# Altium PCB TB88_only.PcbDoc
Units mil, origin at the board's own origin, x right, y up, seen from the top; angles counter-clockwise.
Board outline 1620 x 1380 mil, 2 copper layers (Top Layer, Bottom Layer); 6 components, 4 nets, 14 pads, 0 vias.
Unrouted connection lines stored in the file: 1.
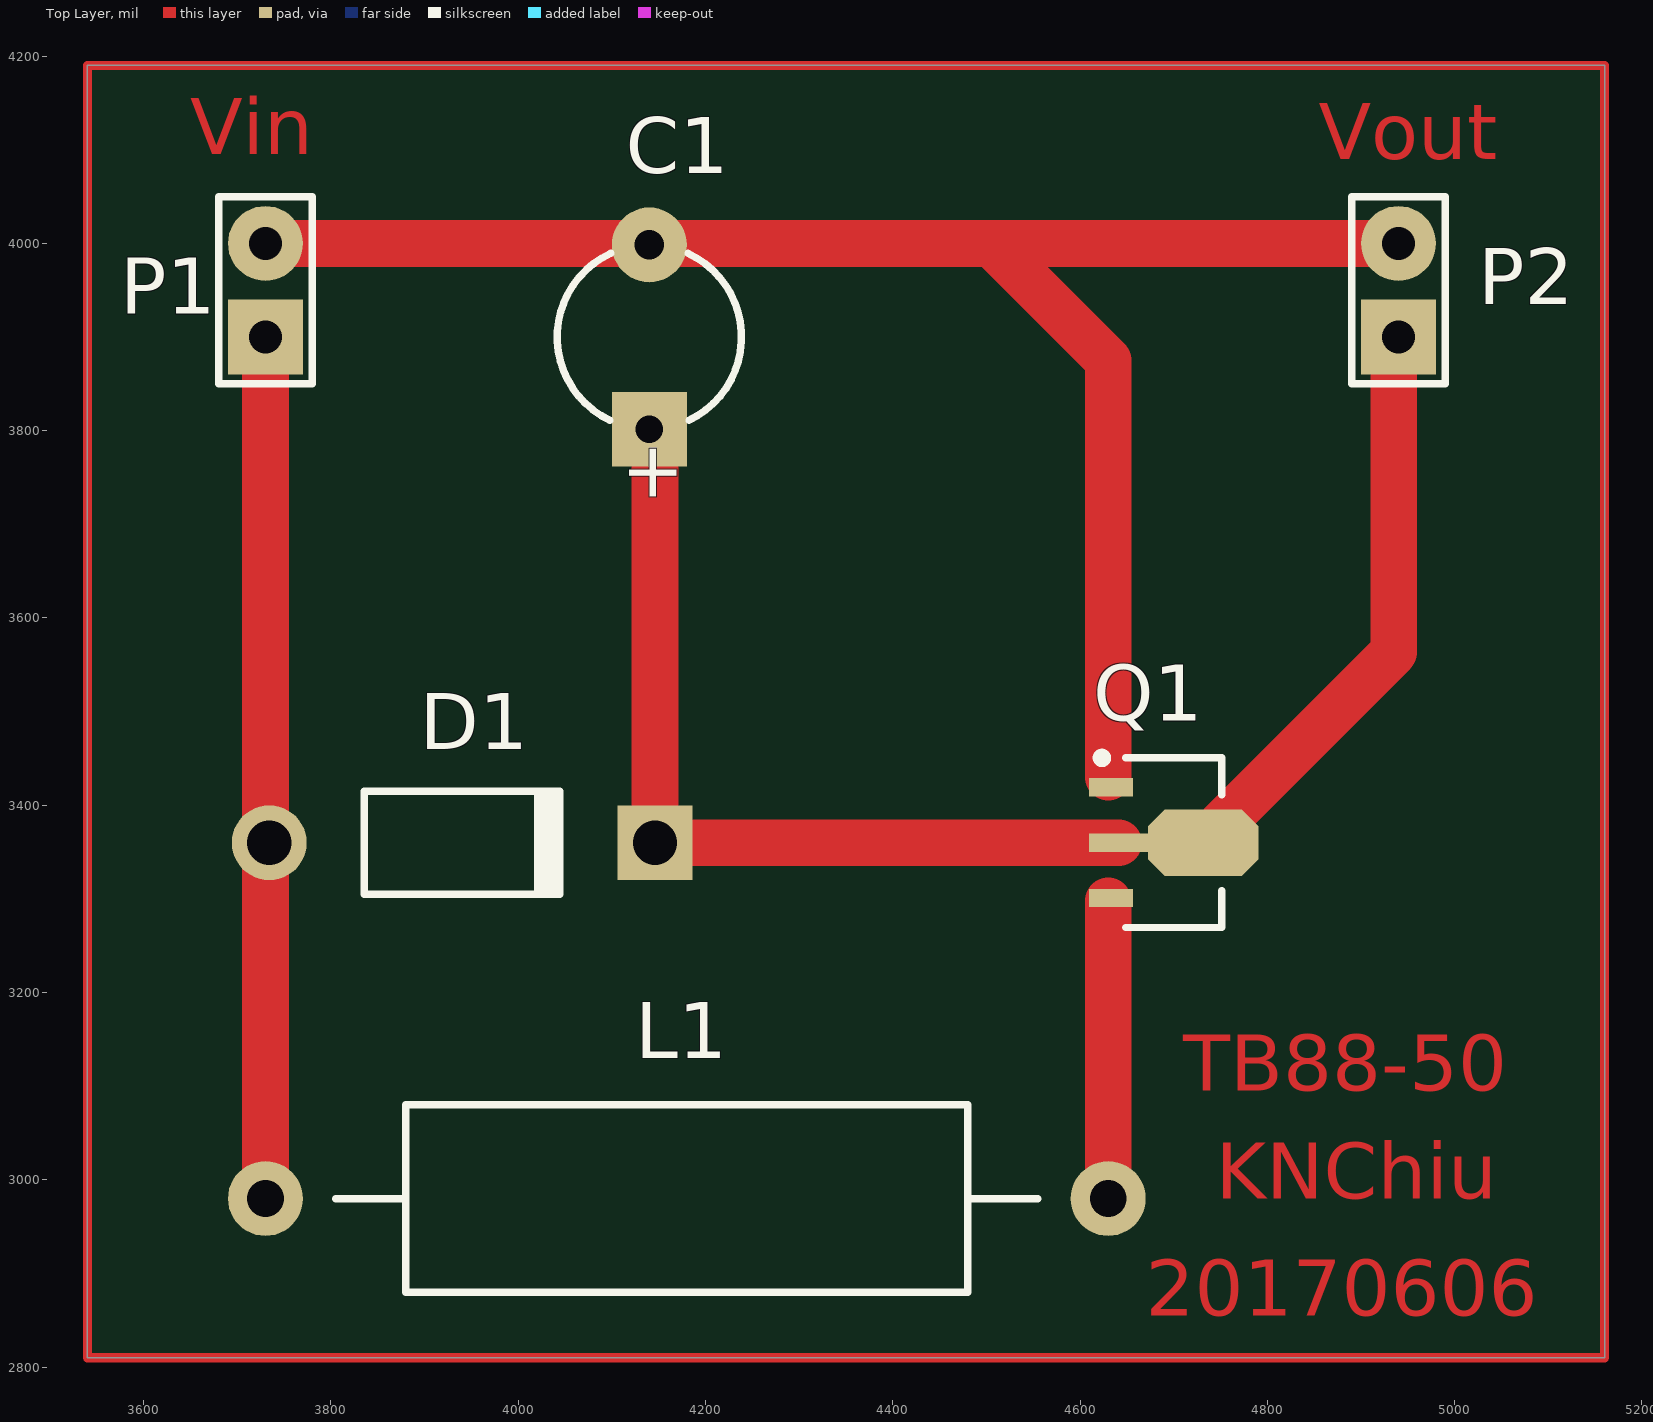
[diagram p0: Top Layer view]
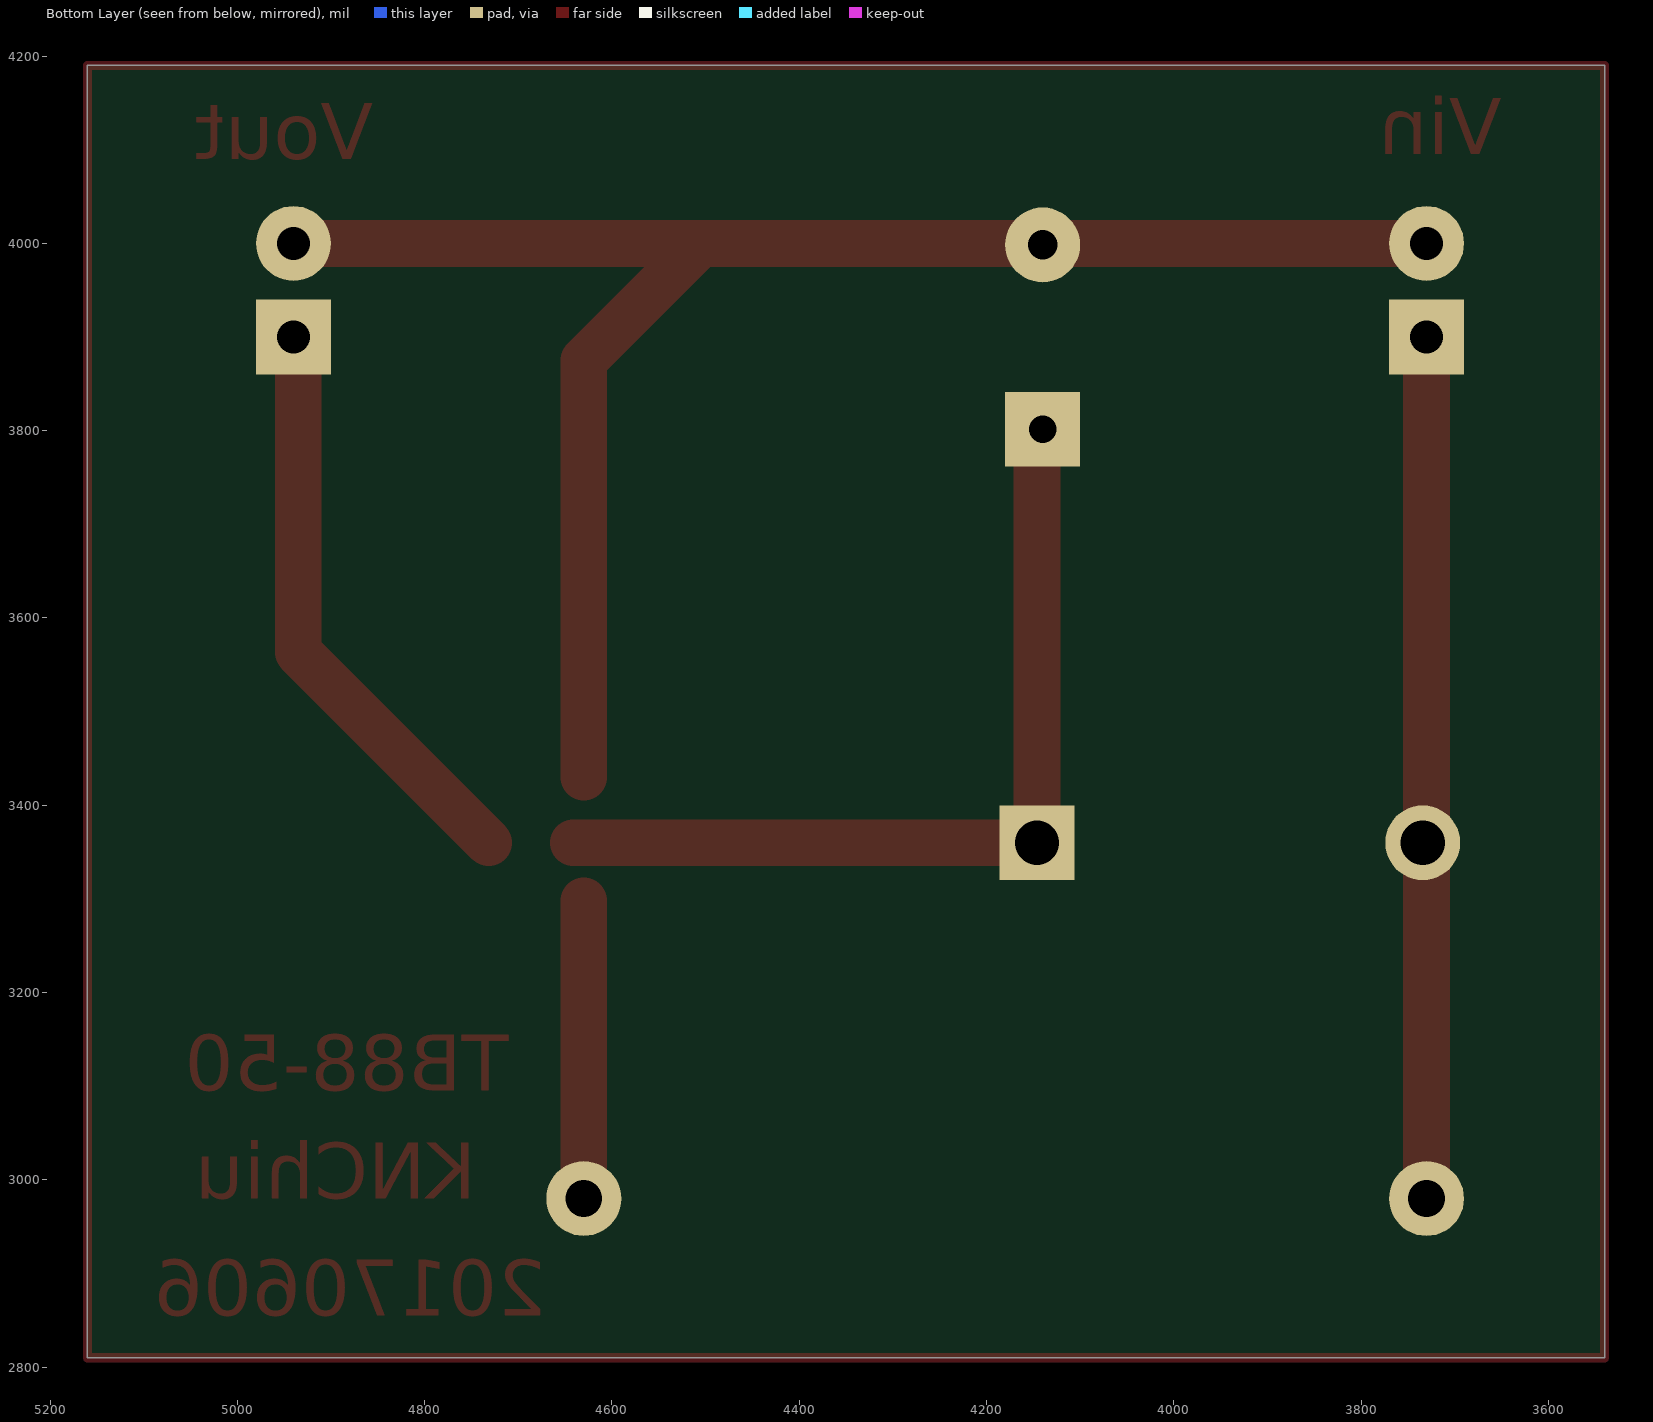
[diagram p1: Bottom Layer view, seen from below]

## Layer stack, top to bottom
Top Layer: signal copper 1.4
Dielectric: dielectric 12.6, FR-4, Dk 4.8
Bottom Layer: signal copper 1.4

## Board outline
3540,2810 5160,2810 5160,4190 3540,4190

## Design rules (kind name [scope] priority, off if disabled: settings)
Clearance [All] p1: gap=10
PolygonConnect [All] p1: connectstyle=Relief reliefconductorwidth=10 reliefentries=4 polygonreliefangle="90 Angle"
RoutingVias [All] p1: holewidth=28 width=50 viastyle="Through Hole" minholewidth=28 minwidth=50 maxholewidth=28 maxwidth=50
SilkscreenOverComponentPads [All] p1: minsilkscreentomaskgap=10
SolderMaskExpansion [All] p1: expansion=4
Width [All] p1: maxlimit=10 minlimit=10 preferedwidth=10
27 further rules are at their usual default settings.

## Components (designator, comment, footprint, x,y, rotation, side; value= is the part's Value field where it differs from the comment)
C1 "" CAPPR5-5x5 4140,3900 r90 top
D1 "1N5819" DIO10.46-5.3x2.8 3940,3360 r0 top
L1 "" AXIAL-0.9 4180,2980 r0 top
P1 "Vin" HDR1X2 3730,3900 r90 top
P2 "Vout" HDR1X2 4940,3900 r90 top
Q1 "TB88-50" SOT89L 4700,3360 r0 top

## Footprints (in the part's own frame and the unit in brackets; to place one, negate y for a bottom-side part, rotate by r counter-clockwise, add the part's x,y. Pads: shape width x height; smd on the part's side, far side on the other; paste and mask are expansions set on the pad)
AXIAL-0.9 [mil] "Axial Device, Thru-Hole; 2 Leads; 0.9 in Pin Spacing"
  round 80 hole 39.37: 1(-450,0) 2(450,0)
  silkscreen extent -375,-100 375,100
CAPPR5-5x5 [mil] "Capacitor, Electrolytic, Radial; Body 5 x 5 mm (Dia.xH typ); Pin Spacing 5 mm (typ)"
  rect 80x80 hole 29.53: 1(-98.43,0)
  round 80 hole 31.5: 2(98.43,0)
  silkscreen extent -89,-98 89,98
DIO10.46-5.3x2.8 [mil] "Diode, Axial; Body 5.2 x 2.7 mm (LxDia. max), Lead Dia. 0.86 mm (max)"
  round 80 hole 47.24: 1(-205.91,0)
  rect 80x80 hole 47.24: 2(205.91,0)
  silkscreen extent -104,-55 108,55
HDR1X2 [mil] "Connector; Header; 2 Position"
  rect 80x80 hole 35.43: 1(0,0)
  round 80 hole 35.43: 2(100,0)
  silkscreen extent -50,-50 150,50
SOT89L [mm] "SOT89, 3-Leads, Body 4.5x2.4 mm, Pitch 1.5mm, Lead Span 4.1mm, IPC High Density"
  rect 1.2x0.5 smd: 1(-1.7,1.5) 3(-1.7,-1.5)
  rect 1.6x0.5 smd: 2(-1.5,0)
  oct 3x1.8 smd: 2(0.8,0)
  silkscreen extent -2.07,-2.3 1.3,2.42, body extent -1.3,-2.3 1.3,2.3, height 1.6

## Part data
C1: library part "Cap Pol1", "Polarized Capacitor (Radial)"
D1: library part "Diode 1N4001", "1 Amp General Purpose Rectifier"
L1: library part "Inductor Iron", "Magnetic-Core Inductor"
P1 P2: library part "Header 2", "Header, 2-Pin"
Q1: library part Diac-PNP, "DIAC"

## Nets (pads, with @x,y where several pads share a name; then routed paths per layer and width w, separated by ;. In a path a pad name is that pad's centre, name@x,y a point inside that pad or via, vN(x,y) a via of type N, cw(c..) or ccw(c..) an arc to the next point about the centre after c; other vN are vias at no path point)
GND: C1.2 P1.2 P2.2 Q1.1 | length 1841.1
  Top Layer w10: 4630,4000 4633.07,3996.93
  Top Layer w50: P1.2@3720,4000 4630,4000 ; 4505,4000 4630,3875 4630,3430 ; 4635,4000 P2.2
NetC1_1: C1.1 D1.2 P2.1 Q1.2 | length 1566.9
  Top Layer w10: C1.1 C1.1@4145.91,3795.67 ; Q1.2@4731.5,3360 Q1.2@4740,3368.5
  Top Layer w50: C1.1@4145.91,3795.67 D1.2 Q1.2@4640.94,3360 ; Q1.2@4731.5,3360 4935,3563.5 P2.1@4935,3891.5
NetD1_1: D1.1 L1.1 P1.1 | length 910
  Top Layer w50: L1.1@3730,2990 P1.1
NetL1_2: L1.2 Q1.3 | length 322.2
  Top Layer w10: Q1.3@4630,3297.87 Q1.3
  Top Layer w50: L1.2 Q1.3@4630,3297.87
copper on no net: | length 6000
  Top Layer w10: 3540,2810 5160,2810 5160,4190 3540,4190 3540,2810

## Other copper
Top Layer:
  text "Vin" at 3650,4095 h60
  text "Vout" at 4855,4090 h60
  text "TB88-50" at 4710,3095 h60
  text "KNChiu" at 4745,2980 h60
  text "20170606" at 4670,2855 h60

## Text inside footprints (layer, text, board x,y; h text height)
C1: Top Overlay "+" at 4169.53,3720.87 h59.06 r90